# Altium PCB 03_boost_converter.PcbDoc
Units mm, origin at the board's own origin, x right, y up, seen from the top; angles counter-clockwise.
Board outline 37.1 x 39.1 mm, 2 copper layers (Top Layer, Bottom Layer), stack 1.571 mm thick; 11 components, 7 nets, 30 pads, 0 vias.
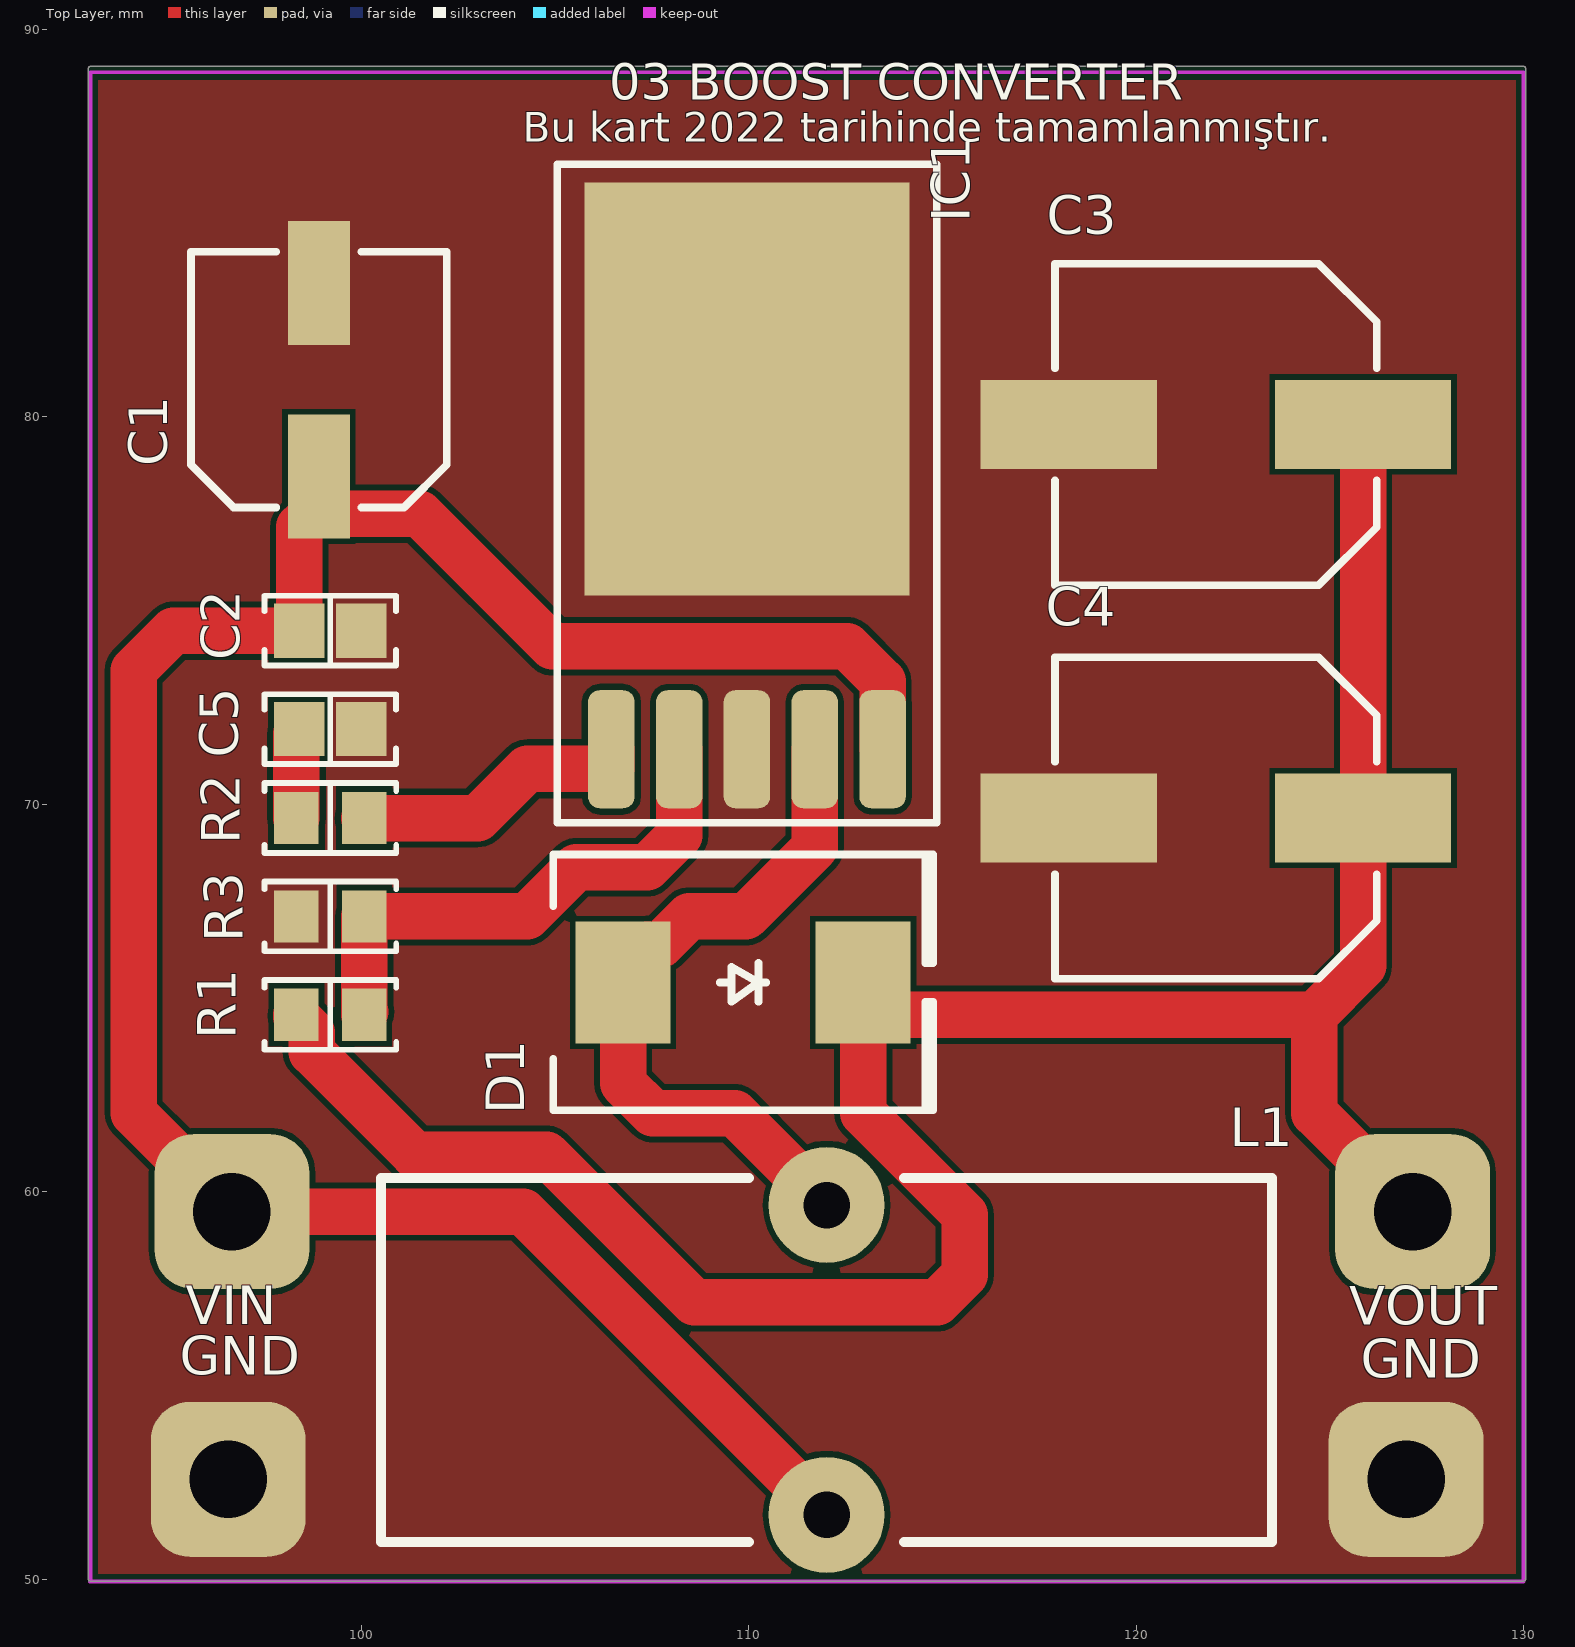
[diagram p0: Top Layer view]
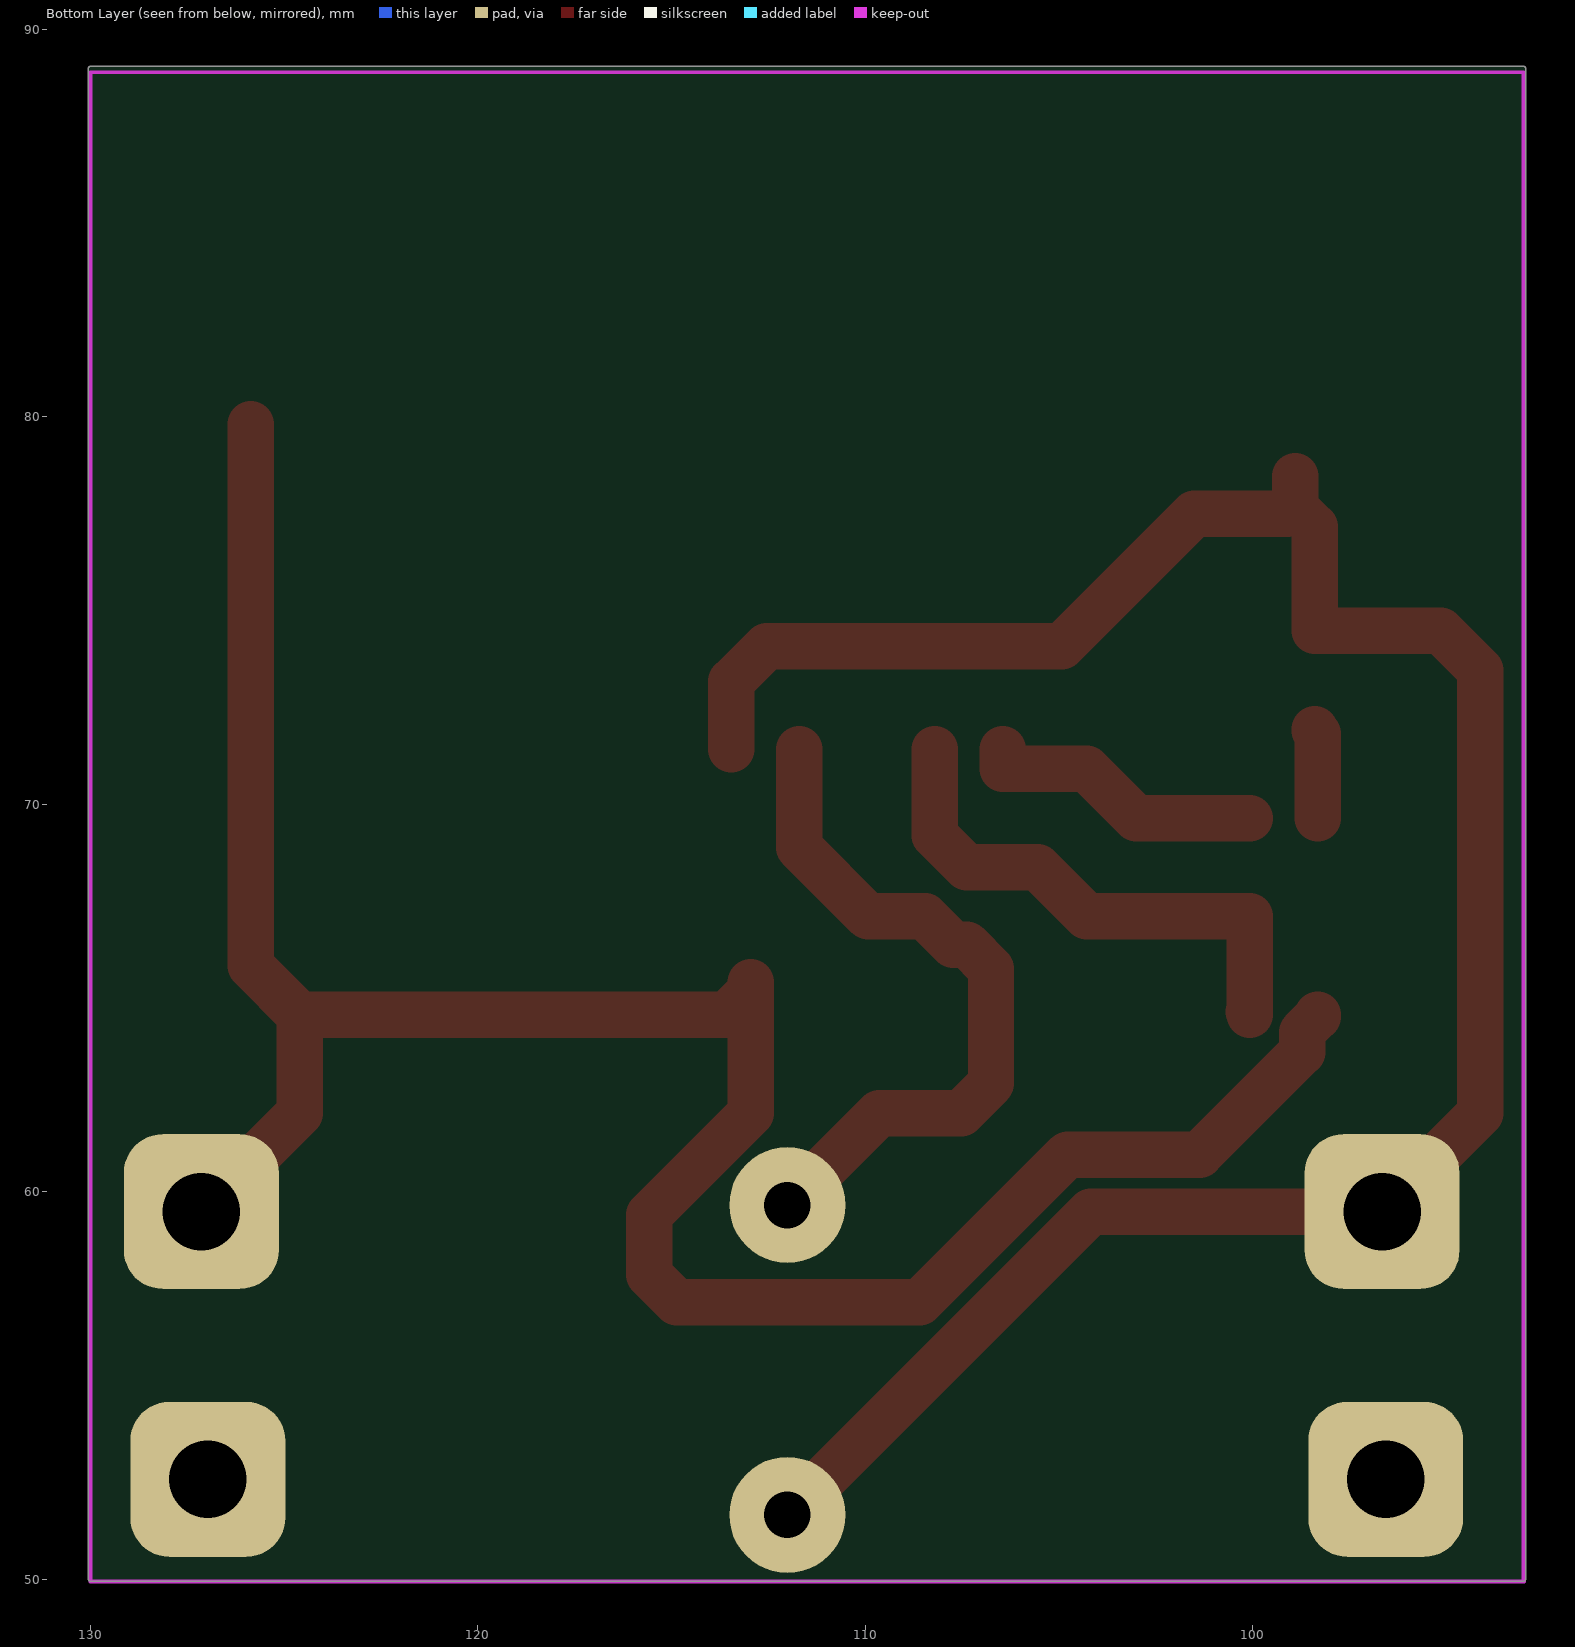
[diagram p1: Bottom Layer view, seen from below]
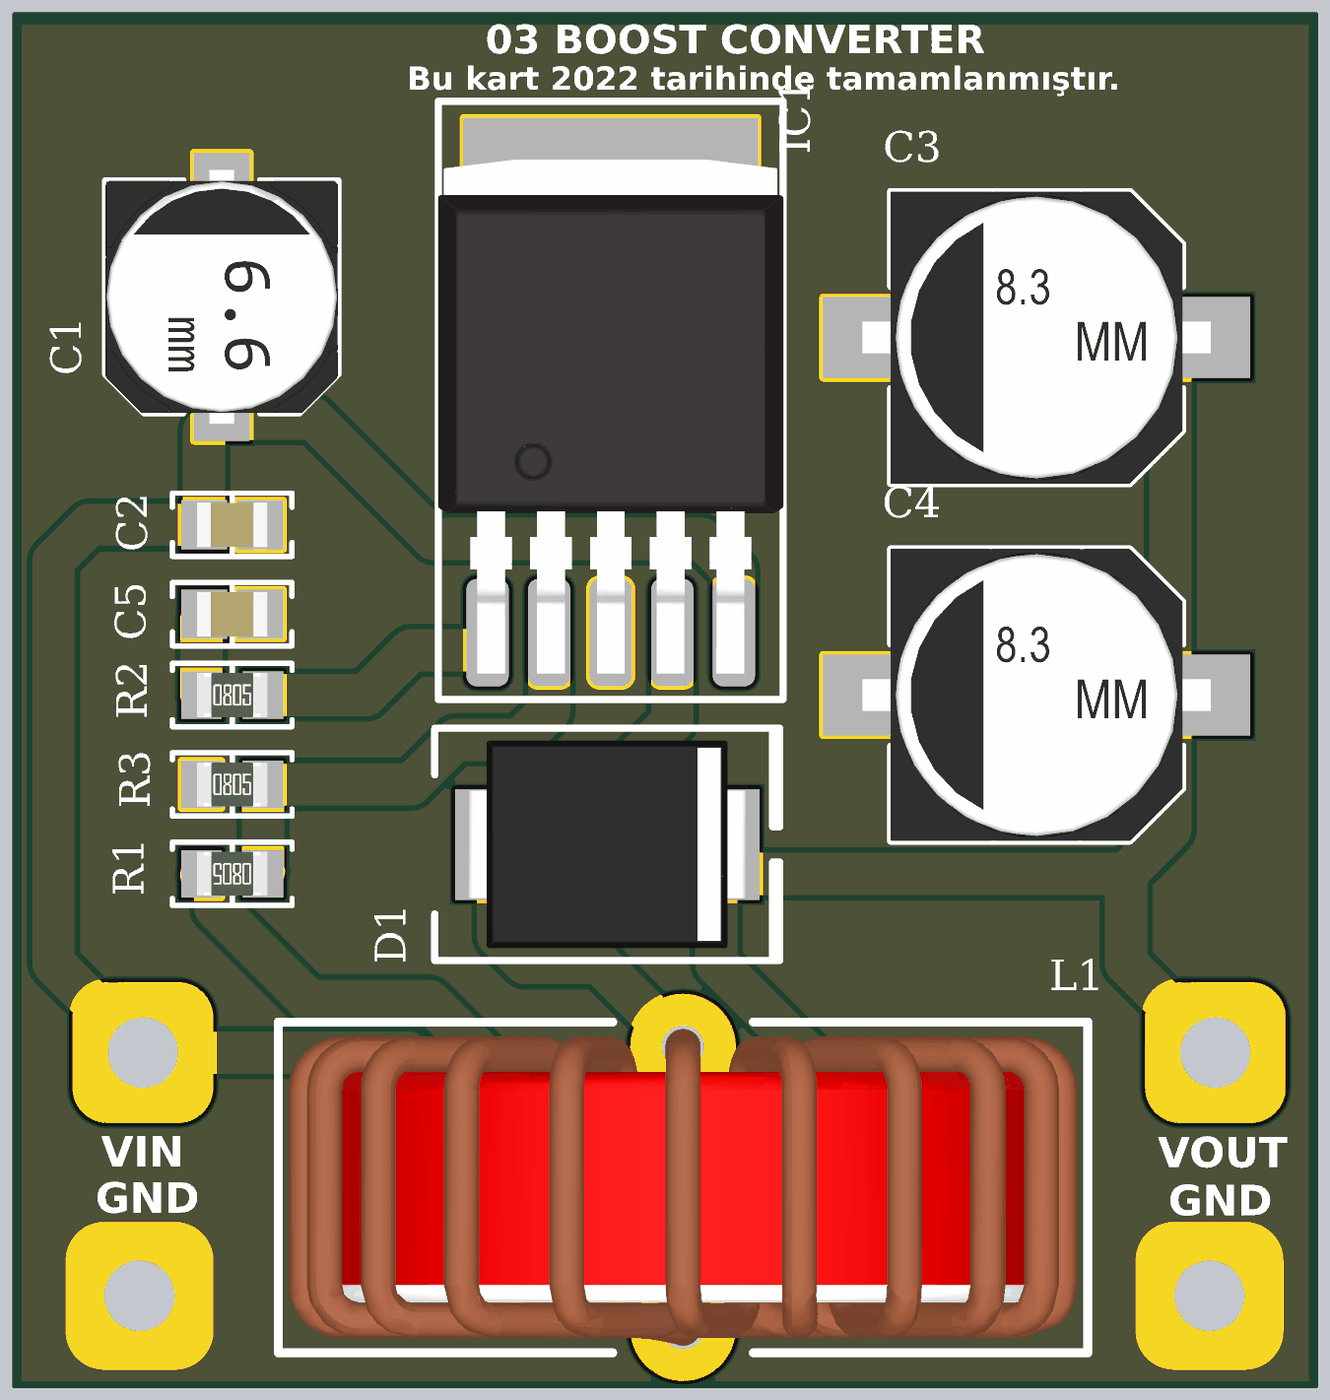
[diagram p2: 3D render of the assembled board from above, using the file's embedded part models]

## Layer stack, top to bottom
Top Solder: solder mask 0.0102, Solder Resist, Dk 3.5
Top Layer: signal copper 0.0356
Dielectric 1: dielectric 1.5, FR-4, Dk 4.8
Bottom Layer: signal copper 0.0356
Bottom Solder: solder mask 0.0102, Solder Resist, Dk 3.5

## Board outline
92.95,50 ccw(c93,50) 93,49.95 130,49.95 ccw(c130,50) 130.05,50 130.05,89 ccw(c130,89) 130,89.05 93,89.05 ccw(c93,89) 92.95,89

## Design rules (kind name [scope] priority, off if disabled: settings)
Clearance [All] p1: gap=0.152 ignorepadtopadclearanceinfootprint=FALSE
HoleSize [All] p1: absolutevalues=TRUE maxlimit=5 minlimit=0.025 maxpercent=80.000 minpercent=20.000
MinimumSolderMaskSliver [All] p1: minsoldermaskwidth=0.05
PolygonConnect [All] p1: connectstyle=Direct reliefconductorwidth=0.254 reliefentries=4 polygonreliefangle="90 Angle" airgapwidth=0.254
RoutingVias [All] p1: holewidth=0.5 width=0.8 viastyle="Through Hole" minholewidth=0.3 minwidth=0.5 maxholewidth=1 maxwidth=2
SilkToSilkClearance [All] p1: silktosilkclearance=0
SilkToSolderMaskClearance [IsPad] p1: minsilkscreentomaskgap=0 clearancetoexposedcopper=TRUE
SolderMaskExpansion [All] p1: expansion=0.102 istentingtop=FALSE
Width [All] p1: maxlimit=2 minlimit=0.152 preferedwidth=0.5
26 further rules are at their usual default settings.

## Components (designator, comment, footprint, x,y, rotation, side; value= is the part's Value field where it differs from the comment)
C1 "56µF" "CAP ALSMD 6.6MM H7.7MM" 98.898,80.965 r90 top
C2 "0.1µF" "CAP 0805_2012" 99.194,74.485 r180 top
C3 "100µF" "CAP ALSMD 8.3MM H10.5MM" 122.054,79.808 r180 top
C4 "100µF" "CAP ALSMD 8.3MM H10.5MM" 122.054,69.648 r180 top
C5 "0.68µF" "CAP 0805_2012" 99.194,71.945 r180 top
D1 "SURS8360T3G" "DO214AB SMC" 109.85,65.404 r0 top
IC1 "LM2587" D2PAK 110.05,79.273 r0 top
L1 "100µH" 7447070 112.005,55.657 r180 top
R1 "56 kOhms" "RES 0805_2012" 99.194,64.568 r180 top
R2 "3 kOhms" "RES 0805_2012" 99.194,69.648 r0 top
R3 "2 kOhms" "RES 0805_2012" 99.194,67.108 r0 top

## Footprints (in the part's own frame and the unit in brackets; to place one, negate y for a bottom-side part, rotate by r counter-clockwise, add the part's x,y. Pads: shape width x height; smd on the part's side, far side on the other; paste and mask are expansions set on the pad)
7447070 [mm] "100 µH Unshielded Toroidal Inductor 5 A 35mOhm Max Radial, Vertical (Open)"
  round 3 hole 1.2: 1(0,4) 2(0,-4)
  silkscreen extent -11.5,-4.7 11.5,4.7, body extent -11.21,-4.5 11.21,4.5, height 23.21
"CAP 0805_2012" [mm] "Chip Capacitor, 2-Leads, Body 2.00x1.20mm, IPC Medium Density"
  rect 1.3x1.4 smd: 1(-0.8,0) 2(0.8,0)
  silkscreen extent -1.7,-0.9 1.7,0.9, body extent -1,-0.64 1,0.64, height 1.26
"CAP ALSMD 6.6MM H7.7MM" [mm] "Aluminum Electrolytic Capacitor, Body 6.60x6.60x7.70mm, IPC Low Density"
  rect 3.2x1.6 smd: 1(-2.5,0) 2(2.5,0)
  silkscreen extent -3.3,-3.3 3.3,3.3, body extent -3.6,-3.3 3.6,3.3, height 7.7
"CAP ALSMD 8.3MM H10.5MM" [mm] "Aluminum Electrolytic Capacitor, Body 8.30x8.30x10.50mm, IPC Low Density"
  rect 4.55x2.3 smd: 1(-3.8,0) 2(3.8,0)
  silkscreen extent -4.15,-4.15 4.15,4.15, body extent -4.95,-4.15 4.95,4.15, height 10.5
D2PAK [mm]
  rrect50% 1.2x3.05 smd: 1(-3.6,-7.85) 2(-1.85,-7.85) 3(-0.1,-7.85) 4(1.65,-7.85) 5(3.4,-7.85)
  rect 8.38x10.66 smd mask+0.102: 3(-0.1,1.45)
  silkscreen extent -5,-9.75 4.8,7.25, body extent -5.01,-9.01 4.81,5.59, height 4.22
"DO214AB SMC" [mm] "Molded Diode, 2-Leads, Body 6.85x5.90mm, IPC Medium Density"
  rect 2.45x3.15 smd: 1(-3.1,0) 2(3.1,0)
  silkscreen extent -4.9,-3.3 4.9,3.3, body extent -3.97,-2.95 3.97,2.95, height 2.6
"RES 0805_2012" [mm] "Chip Resistor, 2-Leads, Body 2.00x1.25mm, IPC Medium Density"
  rect 1.15x1.35 smd: 1(-0.875,0) 2(0.875,0)
  silkscreen extent -1.7,-0.9 1.7,0.9, body extent -1,-0.62 1,0.63, height 0.6

## Part data
C1: library part UUD1V560MCL1GS, "CAP ALUM 56UF 20% 35V SMD", Device Package="Radial, Can - SMD", Lifetime @ Temp.="2000 Hrs @ 105°C", manufacturer=Nichicon, Operating Temperature="-55°C ~ 105°C", Ripple Current @ High Frequency="280mA @ 100kHz", Ripple Current @ Low Frequency="140mA @ 120Hz", Supplier Part Number 1=493-2288-1-ND, Tolerance=±20%, Voltage - Rated=35V, Applications="General Purpose", Capacitance=56µF, componentlink1description=Datasheet, componentlink1url=http://nichicon-us.com/english/products/pdfs/e-uud.pdf, componentlink2description="DigiKey Link", componentlink2url=http://digikey.com/product-detail/en/nichicon/UUD1V560MCL1GS/493-2288-1-ND/590263, Height - Seated (Max)="0.303\" (7.70mm)", lastupdated="2.09.2020 01:25:34", Lifecycle Status=Active, Minimum Order=1, Mounting Type="Surface Mount", Package / Case="Radial, Can - SMD", packaging=TapeAndReel, Part Number=UUD1V560MCL1GS, Part Status=Active, partid=8318, Polarization=Polar, price=0.14, series=UUD, Size / Dimension="0.248\" Dia (6.30mm)", Supplier 1=DigiKey, Surface Mount Land Size="0.260\" L x 0.260\" W (6.60mm x 6.60mm)", Impedance="340 mOhms"
C2: library part VJ0805Y104MXAMR, "CAP CER 0.1UF 50V X7R 0805", Device Package="0805 (2012 Metric)", manufacturer="Vishay Vitramon", Operating Temperature="-55°C ~ 150°C", Supplier Part Number 1=720-1755-1-ND, Temperature Coefficient=X7R, Tolerance=±20%, Voltage - Rated=50V, Applications="General Purpose", Capacitance=0.1µF, componentlink1description=Datasheet, componentlink1url=http://www.vishay.com/docs/45199/vjcommercialseries.pdf, componentlink2description="DigiKey Link", componentlink2url=http://digikey.com/product-detail/en/vishay-vitramon/VJ0805Y104MXAMR/720-1755-1-ND/8324175, lastupdated="2.09.2020 01:04:19", Lifecycle Status=Active, Minimum Order=1, Mounting Type="Surface Mount, MLCC", Package / Case="0805 (2012 Metric)", packaging=TapeAndReel, Part Number=VJ0805Y104MXAMR, Part Status=Active, partid=14439, price=0.08, series=VJ, Size / Dimension="0.079\" L x 0.049\" W (2.00mm x 1.25mm)", Supplier 1=DigiKey, Thickness (Max)="0.057\" (1.45mm)"
C3 C4: library part EEE-FK1H101P, "CAP ALUM 100UF 20% 50V SMD", Device Package="Radial, Can - SMD", Lifetime @ Temp.="2000 Hrs @ 105°C", manufacturer="Panasonic Electronic Components", Operating Temperature="-55°C ~ 105°C", Ratings=AEC-Q200, Ripple Current @ High Frequency="350mA @ 100kHz", Ripple Current @ Low Frequency="262.5mA @ 120Hz", Supplier Part Number 1=PCE3809CT-ND, Tolerance=±20%, Voltage - Rated=50V, Applications=Automotive, Capacitance=100µF, componentlink2description="DigiKey Link", componentlink2url=http://digikey.com/product-detail/en/panasonic-electronic-components/EEE-FK1H101P/PCE3809CT-ND/766185, Height - Seated (Max)="0.413\" (10.50mm)", lastupdated="2.09.2020 01:25:16", Lifecycle Status=Active, Minimum Order=1, Mounting Type="Surface Mount", Package / Case="Radial, Can - SMD", packaging=TapeAndReel, Part Number=EEE-FK1H101P, Part Status=Active, partid=7485, Polarization=Polar, price=0.25, series=FK, Size / Dimension="0.315\" Dia (8.00mm)", Supplier 1=DigiKey, Surface Mount Land Size="0.327\" L x 0.327\" W (8.30mm x 8.30mm)", Impedance="340 mOhms"
C5: library part C0805X684K5RECAUTO, "CAP CER 0.68UF 50V X7R 0805", Device Package="0805 (2012 Metric)", manufacturer=KEMET, Operating Temperature="-55°C ~ 125°C", Ratings=AEC-Q200, Supplier Part Number 1=399-17848-1-ND, Temperature Coefficient=X7R, Tolerance=±10%, Voltage - Rated=50V, Applications="Automotive, Boardflex Sensitive, ESD Protection", Capacitance=0.68µF, componentlink1description=Datasheet, componentlink1url=https://api.kemet.com/component-edge/download/datasheet/C0805X684K5RECAUTO.pdf, componentlink2description="DigiKey Link", componentlink2url=http://digikey.com/product-detail/en/kemet/C0805X684K5RECAUTO/399-17848-1-ND/8640515, Features="Soft Termination", lastupdated="2.09.2020 01:04:09", Lifecycle Status=Active, Minimum Order=1, Mounting Type="Surface Mount, MLCC", Package / Case="0805 (2012 Metric)", packaging=TapeAndReel, Part Number=C0805X684K5RECAUTO, Part Status=Active, partid=17460, price=0.08, series="ESD SMD Auto X7R", Size / Dimension="0.079\" L x 0.049\" W (2.00mm x 1.25mm)", Supplier 1=DigiKey, Thickness (Max)="0.055\" (1.40mm)"
D1: "DIODE GEN PURP 600V 3A SMC", Current - Average Rectified (Io)=3A, Current - Reverse Leakage @ Vr="10µA @ 600V", manufacturer="ON Semiconductor", Operating Temperature - Junction="-65°C ~ 175°C", Package / Case="DO-214AB, SMC", Supplier Device Package=SMC, Supplier Part Number 1=SURS8360T3GOSCT-ND, Voltage - DC Reverse (Vr) (Max)=600V, Voltage - Forward (Vf) (Max) @ If="1.25V @ 3A", componentlink1description=Datasheet, componentlink1url=http://www.onsemi.com/pub/Collateral/MURS320T3-D.PDF, componentlink2description="DigiKey Link", componentlink2url=http://digikey.com/product-detail/en/on-semiconductor/SURS8360T3G/SURS8360T3GOSCT-ND/9087771, Diode Type=Standard, lastupdated="2.09.2020 01:18:57", Lifecycle Status=Active, Minimum Order=1, Mounting Type="Surface Mount", packaging=TapeAndReel, Part Number=SURS8360T3G, Part Status=Active, partid=348, price=0.30, Reverse Recovery Time (trr)=75ns, series=-, Speed="Fast Recovery =< 500ns, > 200mA (Io)", Supplier 1=DigiKey
IC1: "Boost Converter"
L1: library part SRR1280-101M, "FIXED IND 100UH 2.1A 150MOHM SMD", Current - Saturation=2A, Current Rating (Amps)=2.1A, DC Resistance (DCR)="150mOhm Max", Device Package=Nonstandard, Frequency - Self Resonant=4.5MHz, manufacturer="Bourns Inc.", Operating Temperature="-40°C ~ 125°C", Q @ Freq="18 @ 796kHz", Supplier Part Number 1=SRR1280-101MCT-ND, Tolerance=±20%, Inductance Frequency - Test=100kHz, componentlink1description=Datasheet, componentlink1url=https://www.bourns.com/docs/Product-Datasheets/SRR1280.pdf, componentlink2description="DigiKey Link", componentlink2url=http://digikey.com/product-detail/en/bourns-inc/SRR1280-101M/SRR1280-101MCT-ND/2127046, Height - Seated (Max)="0.315\" (8.00mm)", lastupdated="2.09.2020 01:22:09", Lifecycle Status=Active, Material - Core=Ferrite, Minimum Order=1, Mounting Type="Surface Mount", Package / Case=Nonstandard, packaging=TapeAndReel, Part Number=SRR1280-101M, Part Status=Active, partid=24, price=0.65, series=SRR1280, Shielding=Shielded, Size / Dimension="0.492\" L x 0.492\" W (12.50mm x 12.50mm)", Supplier 1=DigiKey, Type=Wirewound, Inductance=100µH
R1: library part CRCW080556K0FKEA, "RES SMD 56K OHM 1% 1/8W 0805", Device Package="0805 (2012 Metric)", manufacturer="Vishay Dale", Operating Temperature="-55°C ~ 155°C", Power (Watts)="0.125W, 1/8W", Ratings=AEC-Q200, Supplier Device Package=0805, Supplier Part Number 1=541-56.0KCCT-ND, Temperature Coefficient=±100ppm/°C, Tolerance=±1%, componentlink1description=Datasheet, componentlink1url=http://www.vishay.com/docs/20035/dcrcwe3.pdf, componentlink2description="DigiKey Link", componentlink2url=http://digikey.com/product-detail/en/vishay-dale/CRCW080556K0FKEA/541-56.0KCCT-ND/1180982, Composition="Thick Film", Features="Automotive AEC-Q200", Height - Seated (Max)="0.020\" (0.50mm)", lastupdated="2.09.2020 01:15:13", Lifecycle Status=Active, Minimum Order=1, Number of Terminations=2, Package / Case="0805 (2012 Metric)", packaging=TapeAndReel, Part Number=CRCW080556K0FKEA, Part Status=Active, partid=32708, price=0.01, Resistance="56 kOhms", series=CRCW, Size / Dimension="0.079\" L x 0.049\" W (2.00mm x 1.25mm)", Supplier 1=DigiKey
R2: library part ERJ-6ENF3001V, "RES SMD 3K OHM 1% 1/8W 0805", Device Package="0805 (2012 Metric)", manufacturer="Panasonic Electronic Components", Operating Temperature="-55°C ~ 155°C", Power (Watts)="0.125W, 1/8W", Ratings=AEC-Q200, Supplier Device Package=0805, Supplier Part Number 1=P3.0KCCT-ND, Temperature Coefficient=±100ppm/°C, Tolerance=±1%, componentlink1description=Datasheet, componentlink1url=https://industrial.panasonic.com/cdbs/www-data/pdf/RDA0000/AOA0000C304.pdf, componentlink2description="DigiKey Link", componentlink2url=http://digikey.com/product-detail/en/panasonic-electronic-components/ERJ-6ENF3001V/P3.0KCCT-ND/1746847, Composition="Thick Film", Features="Automotive AEC-Q200", Height - Seated (Max)="0.028\" (0.70mm)", lastupdated="2.09.2020 01:15:19", Lifecycle Status=Active, Minimum Order=1, Number of Terminations=2, Package / Case="0805 (2012 Metric)", packaging=TapeAndReel, Part Number=ERJ-6ENF3001V, Part Status=Active, partid=30109, price=0.01, Resistance="3 kOhms", series=ERJ, Size / Dimension="0.079\" L x 0.049\" W (2.00mm x 1.25mm)", Supplier 1=DigiKey
R3: library part RC0805FR-072KP, "RES SMD 2K OHM 1% 1/8W 0805", Device Package="0805 (2012 Metric)", manufacturer=Yageo, Operating Temperature="-55°C ~ 155°C", Power (Watts)="0.125W, 1/8W", Supplier Device Package=0805, Supplier Part Number 1=YAG1322CT-ND, Temperature Coefficient=±100ppm/°C, Tolerance=±1%, componentlink1description=Datasheet, componentlink1url=http://www.yageo.com/NewPortal/yageodocoutput?fileName=/pdf/R-Chip/PYu-RC_51_RoHS_P_0.pdf, componentlink2description="DigiKey Link", componentlink2url=http://digikey.com/product-detail/en/yageo/RC0805FR-072KP/YAG1322CT-ND/4935435, Composition="Thick Film", Features="Moisture Resistant", Height - Seated (Max)="0.024\" (0.60mm)", lastupdated="2.09.2020 01:15:22", Lifecycle Status=Active, Minimum Order=1, Number of Terminations=2, Package / Case="0805 (2012 Metric)", packaging=TapeAndReel, Part Number=RC0805FR-072KP, Part Status=Active, partid=28672, price=0.01, Resistance="2 kOhms", series="RC-P Lead Free", Size / Dimension="0.079\" L x 0.049\" W (2.00mm x 1.25mm)", Supplier 1=DigiKey

## Free pads (board coordinates)
  rrect50% 4x4 hole 2: GND(96.56,52.576) GND(126.967,52.577) VIN(96.654,59.488) VOUT(127.134,59.488)

## Nets (pads, with @x,y where several pads share a name; then routed paths per layer and width w, separated by ;. In a path a pad name is that pad's centre, name@x,y a point inside that pad or via, vN(x,y) a via of type N, cw(c..) or ccw(c..) an arc to the next point about the centre after c; other vN are vias at no path point)
GND: C1.2 C2.1 C3.2 C4.2 C5.1 IC1.3 pad.GND R3.1
NetC5_2: C5.2 R2.1 | length 2.3
  Top Layer w1.2: R2.1 98.319,71.82 98.394,71.895 C5.2
NetD1_1: D1.1 IC1.4 L1.2 | length 18.3
  Top Layer w1.2: IC1.4 111.7,68.887 109.921,67.108 108.454,67.108 107.725,66.379 107.375,66.379 106.75,65.754 D1.1 106.75,62.796 107.518,62.028 109.634,62.028 L1.2
NetR1_1: IC1.2 R1.1 R3.2 | length 13.8
  Top Layer w1.2: R1.1@100.094,64.643 100.069,64.618 R1.1 R3.2 104.274,67.108 105.544,68.378 107.381,68.378 108.2,69.197 IC1.2
NetR2_2: IC1.1 R2.2 | length 7.4
  Top Layer w1.2: R2.2 103.004,69.648 104.274,70.918 106.45,70.918 IC1.1
VIN: C1.1 C2.2 IC1.5 L1.1 pad.VIN | length 60.7
  Top Layer w1.2: C1.1 C1.1@98.898,77.705 ; L1.1 104.174,59.488 pad.VIN 94.114,62.028 94.114,73.458 95.141,74.485 C2.2 98.394,77.161 98.898,77.665 C1.1@98.898,77.705 ; IC1.5 113.45,73.172 112.538,74.084 104.918,74.084 101.498,77.505 99.098,77.505 C1.1@98.898,77.705
VOUT: C3.1 C4.1 D1.2 pad.VOUT R1.2 | length 63.4
  Top Layer w1.2: R1.2 98.319,64.518 98.717,64.12 98.717,63.607 101.364,60.96 104.775,60.96 108.585,57.15 114.867,57.15 115.57,57.853 115.57,59.41 112.95,62.029 D1.2@112.95,65.193 ; D1.2 D1.2@112.95,65.193 ; C3.1 C4.1 125.854,65.828 124.594,64.568 ; pad.VOUT 124.594,62.028 124.594,64.568 ; D1.2@112.95,65.193 113.575,64.568 124.594,64.568

## Polygon pours and split planes (outlines as drawn)
GND on Top Layer "GND_L01_P000" (solid, pour order 0): 93,89 130,89 130,49.937 93,49.937 93,89

## Keep-outs
Keep-Out Layer:
  region: 96.52,114.3
  lines w0.1: 92.991,49.937 130,49.937 130,88.9 93,88.9 93,49.937

## Silkscreen, mask and mechanical layers (free items; w line width, h text height)
Top Overlay:
  text "03 BOOST CONVERTER" at 106.389,87.88 h1.6
  text "Bu kart 2022 tarihinde tamamlanmıştır." at 104.158,86.844 h1.3
  text "VIN" at 95.466,56.245 h1.7
  text "VOUT" at 125.492,56.23 h1.7
  text "GND" at 95.305,54.939 h1.7
  text "GND" at 125.794,54.864 h1.7